# Altium PCB ITR9606Board.PcbDoc
Units mil, origin at the board's own origin, x right, y up, seen from the top; angles counter-clockwise.
Board outline 1181.1 x 708.66 mil, 2 copper layers (Top Layer, Bottom Layer); 13 components, 5 nets, 27 pads, 0 vias.
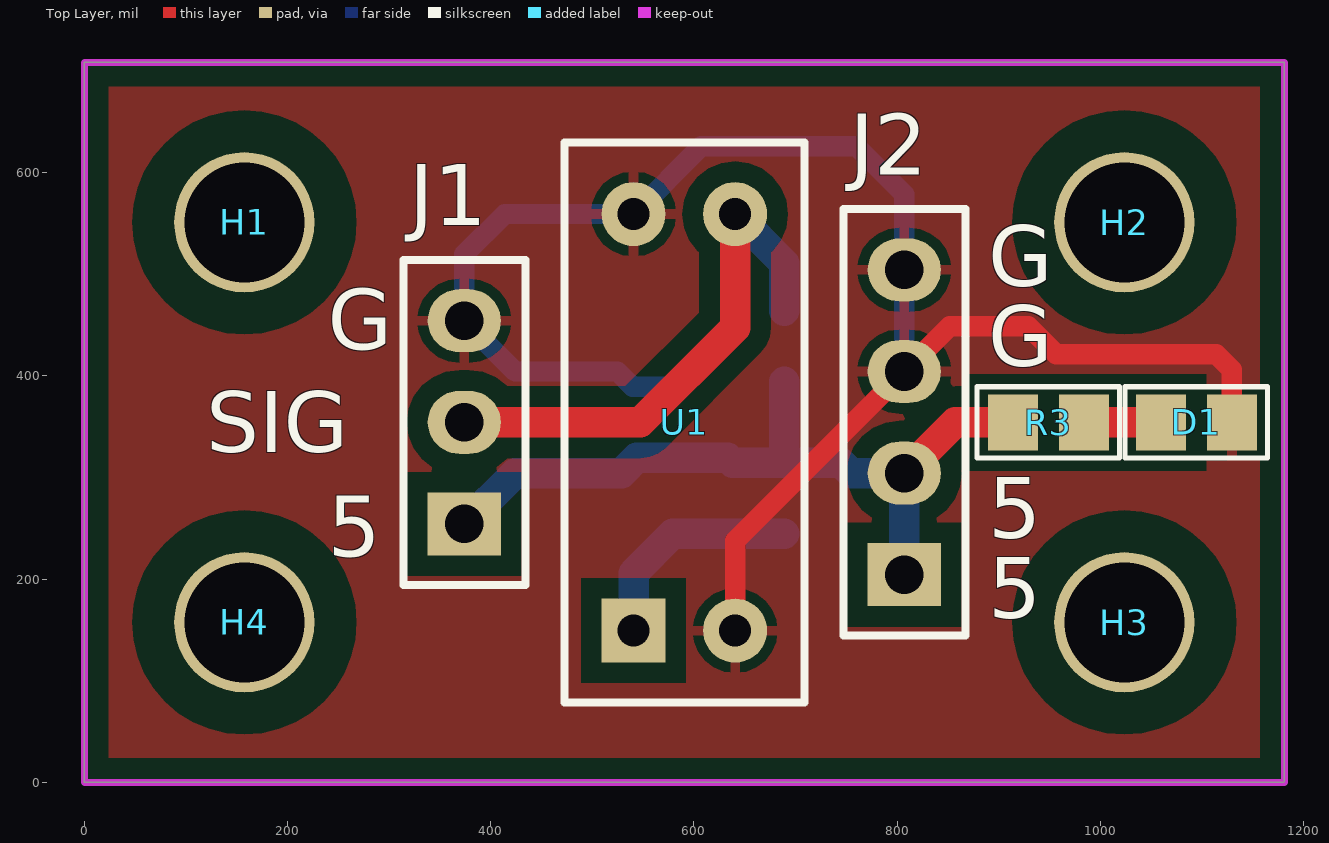
[diagram p0: Top Layer view]
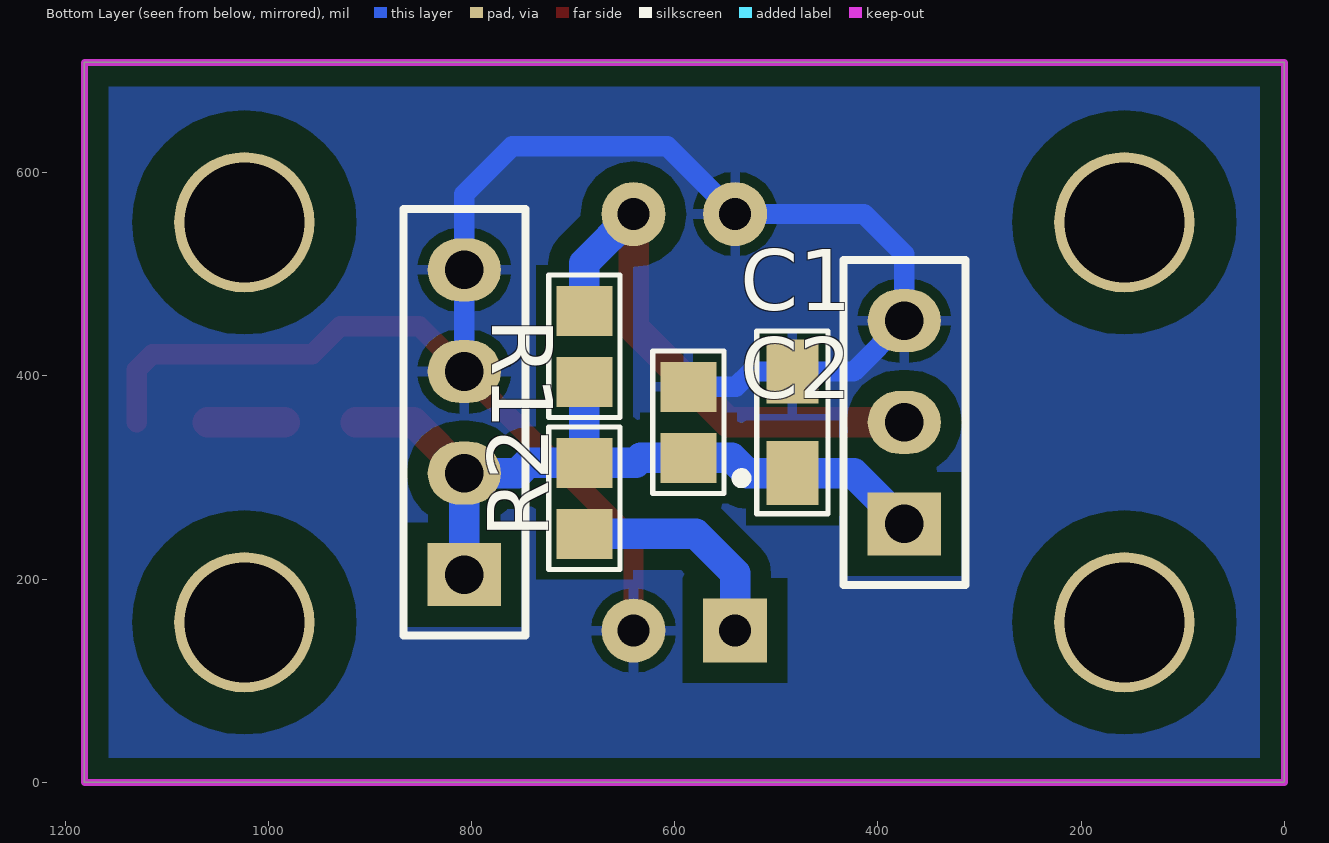
[diagram p1: Bottom Layer view, seen from below]
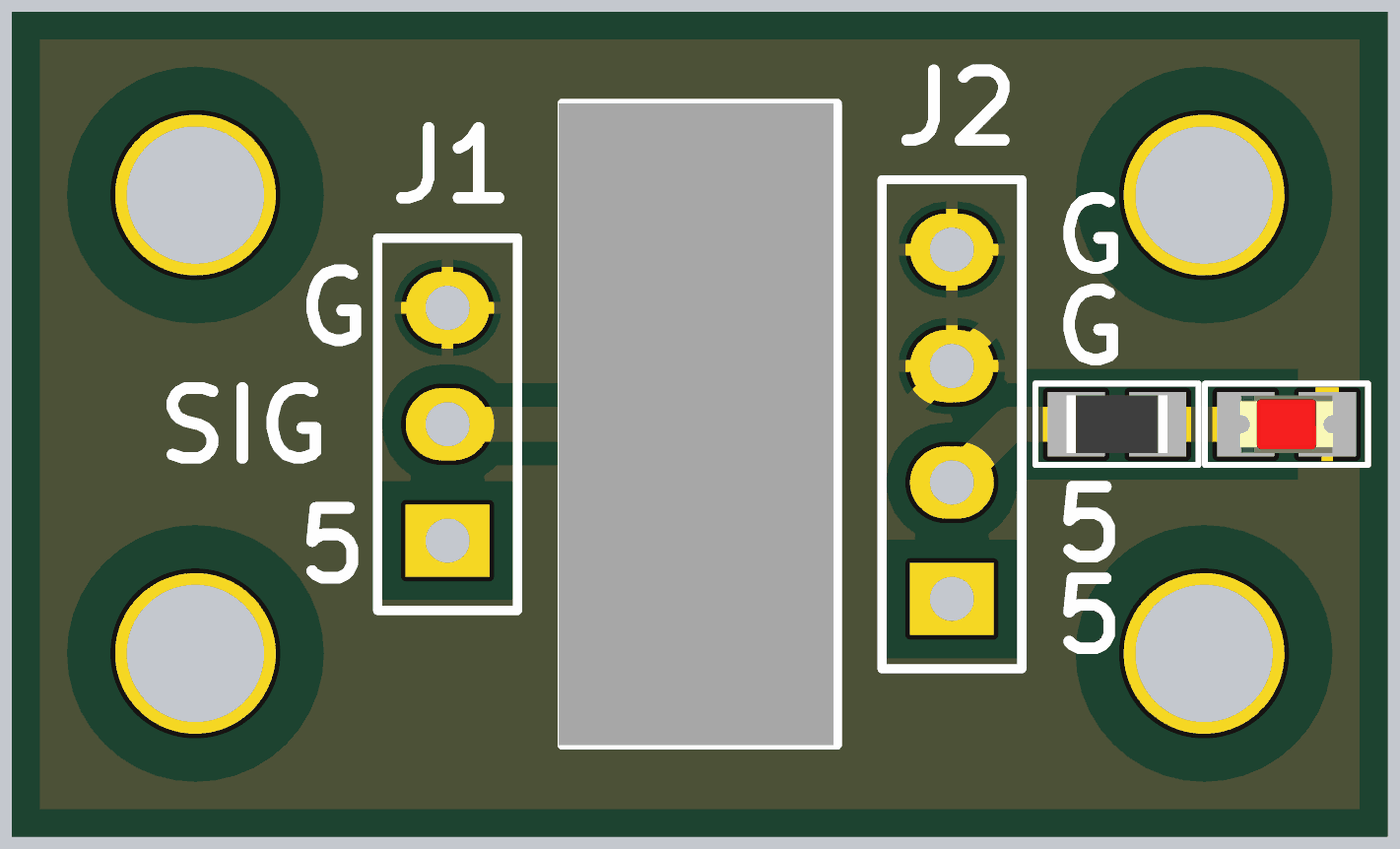
[diagram p2: 3D render of the assembled board from above, using the file's embedded part models]
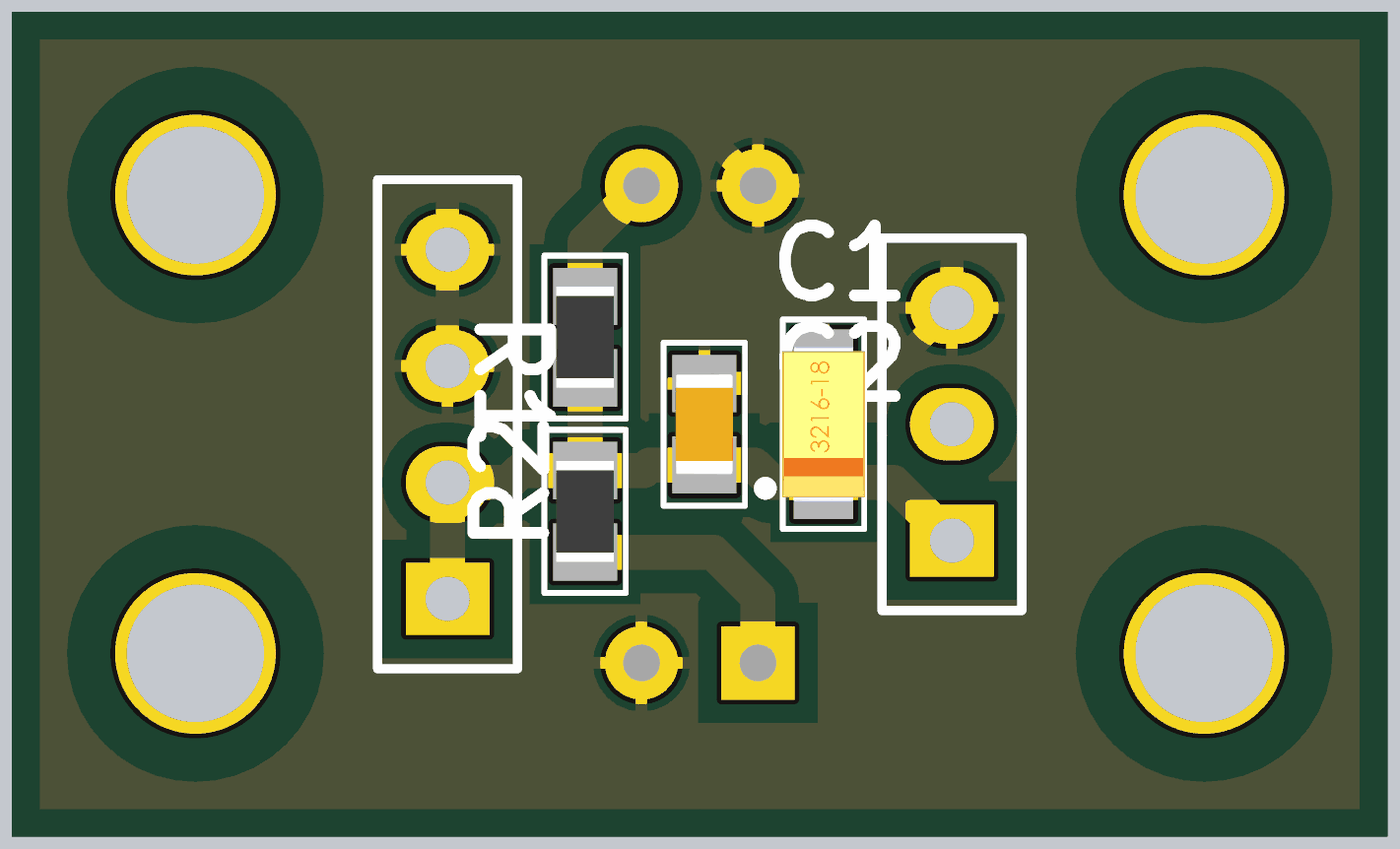
[diagram p3: 3D render of the assembled board from below, using the file's embedded part models]

## Layer stack, top to bottom
Top Solder: solder mask 0.4, Solder Resist, Dk 3.5
Top Layer: signal copper 1.4
Dielectric 1: dielectric 12.6, FR-4, Dk 4.8
Bottom Layer: signal copper 1.4
Bottom Solder: solder mask 0.4, Solder Resist, Dk 3.5

## Board outline
0,0 0,708.66 1181.1,708.66 1181.1,0

## Design rules (kind name [scope] priority, off if disabled: settings)
Clearance Clearance_2 [InNamedPolygon('Bot Layer - GND')] p1: gap=20
Clearance Clearance_1 [InNamedPolygon('Top Layer - GND')] p2: gap=20
Clearance [All] p3: gap=12
MinimumSolderMaskSliver [All] p1 off: minsoldermaskwidth=10
PolygonConnect [All] p1: connectstyle=Relief reliefconductorwidth=10 reliefentries=4 polygonreliefangle="90 Angle" airgapwidth=10
RoutingVias [All] p1: holewidth=24 width=40 viastyle="Through Hole" minholewidth=24 minwidth=40 maxholewidth=24 maxwidth=40
SilkToSilkClearance [All] p1 off: silktosilkclearance=10
SilkToSolderMaskClearance [IsPad] p1 off: minsilkscreentomaskgap=10 clearancetoexposedcopper=TRUE
SolderMaskExpansion [All] p1: expansion=4
Width [All] p1: maxlimit=50 minlimit=10 preferedwidth=20
27 further rules are at their usual default settings.

## Components (designator, comment, footprint, x,y, rotation, side; value= is the part's Value field where it differs from the comment)
C1 "Cap Pol" "Tantalum Size A" 484.25,354.33 r90 bottom
C2 "Cap Non Pol" C0805 586.61,354.33 r90 bottom
D1 "LED" D0805 1094.49,354.33 r0 top
H1 "Drill 3mm" "Drill 3MM" 157.48,551.18 r0 top locked
H2 "Drill 3mm" "Drill 3MM" 1023.62,551.18 r0 top locked
H3 "Drill 3mm" "Drill 3MM" 1023.62,157.48 r0 top locked
H4 "Drill 3mm" "Drill 3MM" 157.48,157.48 r0 top locked
J1 "Header 1x3" "Header 1x3 Oval" 374.02,354.33 r90 top
J2 "Header 1x4" "Header 1x4 Oval" 807.09,354.33 r90 top
R1 "Resistor" R0805 688.98,279.53 r270 bottom
R2 "Resistor" R0805 688.98,429.13 r90 bottom
R3 "Resistor" R0805 948.82,354.33 r0 top
U1 "ITR9606-F" ITR9606-F 590.55,354.33 r90 top locked

## Footprints (in the part's own frame and the unit in brackets; to place one, negate y for a bottom-side part, rotate by r counter-clockwise, add the part's x,y. Pads: shape width x height; smd on the part's side, far side on the other; paste and mask are expansions set on the pad)
C0805 [mm] "Chip Capacitor, 2-Leads, Body 2.00x1.25mm"
  rect 1.25x1.4 smd: 1(-0.889,0) 2(0.889,0)
  silkscreen extent -1.78,-0.89 1.78,0.89, body extent -1.1,-0.63 1.1,0.63, height 0.6
D0805 [mm]
  rect 1.25x1.4 smd: 1(-0.889,0) 2(0.889,0)
  silkscreen extent -1.78,-0.89 1.78,0.89, body extent -1.01,-0.63 1.01,0.63, height 1.1
"Drill 3MM" [mil]
  round 138 hole 118.11: 1(0,0)
"Header 1x3 Oval" [mil] "2.54mm Single Male Pin Header"
  rect 62x72 hole 38: 1(-100,0)
  oval 62x72 hole 38: 2(0,0) 3(100,0)
  silkscreen extent -160,-60 160,60
"Header 1x4 Oval" [mil] "2.54mm Single Male Pin Header"
  rect 62x72 hole 38: 1(-150,0)
  oval 62x72 hole 38: 2(-50,0) 3(50,0) 4(150,0)
  silkscreen extent -210,-60 210,60
ITR9606-F [mm] "Opto Interrupter, Sensing Distance 5mm"
  rect 1.6x1.6 hole 0.8: 1(-5.207,1.27)
  round 1.6 hole 0.8: 2(-5.207,-1.27) 3(5.207,-1.27) 4(5.207,1.27)
  silkscreen extent -7,-3 7,3, body extent -7,-2.92 7,3.08, height 10.1
R0805 [mm]
  rect 1.25x1.4 smd: 1(-0.889,0) 2(0.889,0)
  silkscreen extent -1.78,-0.89 1.78,0.89, body extent -1.1,-0.63 1.1,0.63, height 0.6
"Tantalum Size A" [mm]
  rect 1.6x1.3 smd: 1(-1.27,0) 2(1.27,0)
  silkscreen extent -2.29,-0.89 2.29,1.4, body extent -1.7,-0.9 1.7,0.9, height 1.7

## Part data
C1: "Polarised Capacitor"
C2: "Non Polarised Capacitor"
H1 H2 H3 H4: library part Drill, "Hole 3mm"
J1 J2: "2.54mm Single Male/Female Pin Header"
U1: "Opto Interrupter, Sensing Distance 5mm"

## Nets (pads, with @x,y where several pads share a name; then routed paths per layer and width w, separated by ;. In a path a pad name is that pad's centre, name@x,y a point inside that pad or via, vN(x,y) a via of type N, cw(c..) or ccw(c..) an arc to the next point about the centre after c; other vN are vias at no path point)
5V: C1.1 C2.1 J1.1 J2.1 J2.2 R1.1 R2.1 R3.1 | length 773.3
  Top Layer w30: J2.2 857.09,354.33 R3.1
  Bottom Layer w30: J1.1 424.02,304.33 C1.1 528.74,304.33 543.74,319.33 C2.1 633.43,319.33 638.23,314.53 R1.1 ; R2.1 R1.1 ; J2.1 J2.2 754.72,304.33 744.53,314.53 R1.1
GND: C1.2 C2.2 D1.2 J1.3 J2.3 J2.4 U1.2 U1.4 | length 1710.8
  Top Layer w20: U1.2 640.55,237.8 J2.3 851.57,448.82 929.13,448.82 956.69,421.26 1114.17,421.26 1129.49,405.94 D1.2
  Bottom Layer w20: C2.2@586.18,389.76 C2.2 539.8,389.33 524.8,404.33 C1.2 424.02,404.33 J1.3 374.02,519.68 413.66,559.33 U1.4 607.2,625.98 759.84,625.98 807.09,578.74 J2.4 J2.3
NetD1_1: D1.1 R3.2 | length 75.7
  Top Layer w30: R3.2 D1.1
NetR1_2: R1.2 U1.1 | length 221
  Bottom Layer w30: U1.1 540.55,205.91 579.17,244.53 R1.2
OUT: J1.2 R2.2 U1.3 | length 532.1
  Top Layer w30: J1.2 547.24,354.33 640.55,447.64 U1.3
  Bottom Layer w30: U1.3 688.98,510.91 R2.2
pads on no net: H1.1 H2.1 H3.1 H4.1

## Polygon pours and split planes (outlines as drawn)
GND on Top Layer "Top Layer - GND" (solid, remove dead copper, pour order 0): 0,708.66 1181.1,708.66 1181.1,0 0,0
GND on Bottom Layer "Bot Layer - GND" (solid, remove dead copper, pour order 2): 0,708.66 1181.1,708.66 1181.1,0 0,0

## Keep-outs
Keep-Out Layer:
  the board outline again, w7

## Silkscreen, mask and mechanical layers (free items; w line width, h text height)
Top Overlay:
  text "G" at 889.76,488.19 h60
  text "G" at 239.77,426 h60
  text "G" at 889.76,409.45 h60
  text "SIG" at 119.81,325 h60
  text "5" at 889.76,240.16 h60
  text "5" at 239.77,222 h60
  text "5" at 889.76,161.42 h60